# Altium PCB Main_PCB.PcbDoc (part 2 of 2)
Units mil, origin at the board's own origin, x right, y up, seen from the top; angles counter-clockwise.
Board outline 5905.51 x 3937.01 mil, 2 copper layers (Top Layer, Bottom Layer); 255 components, 189 nets, 763 pads, 261 vias.
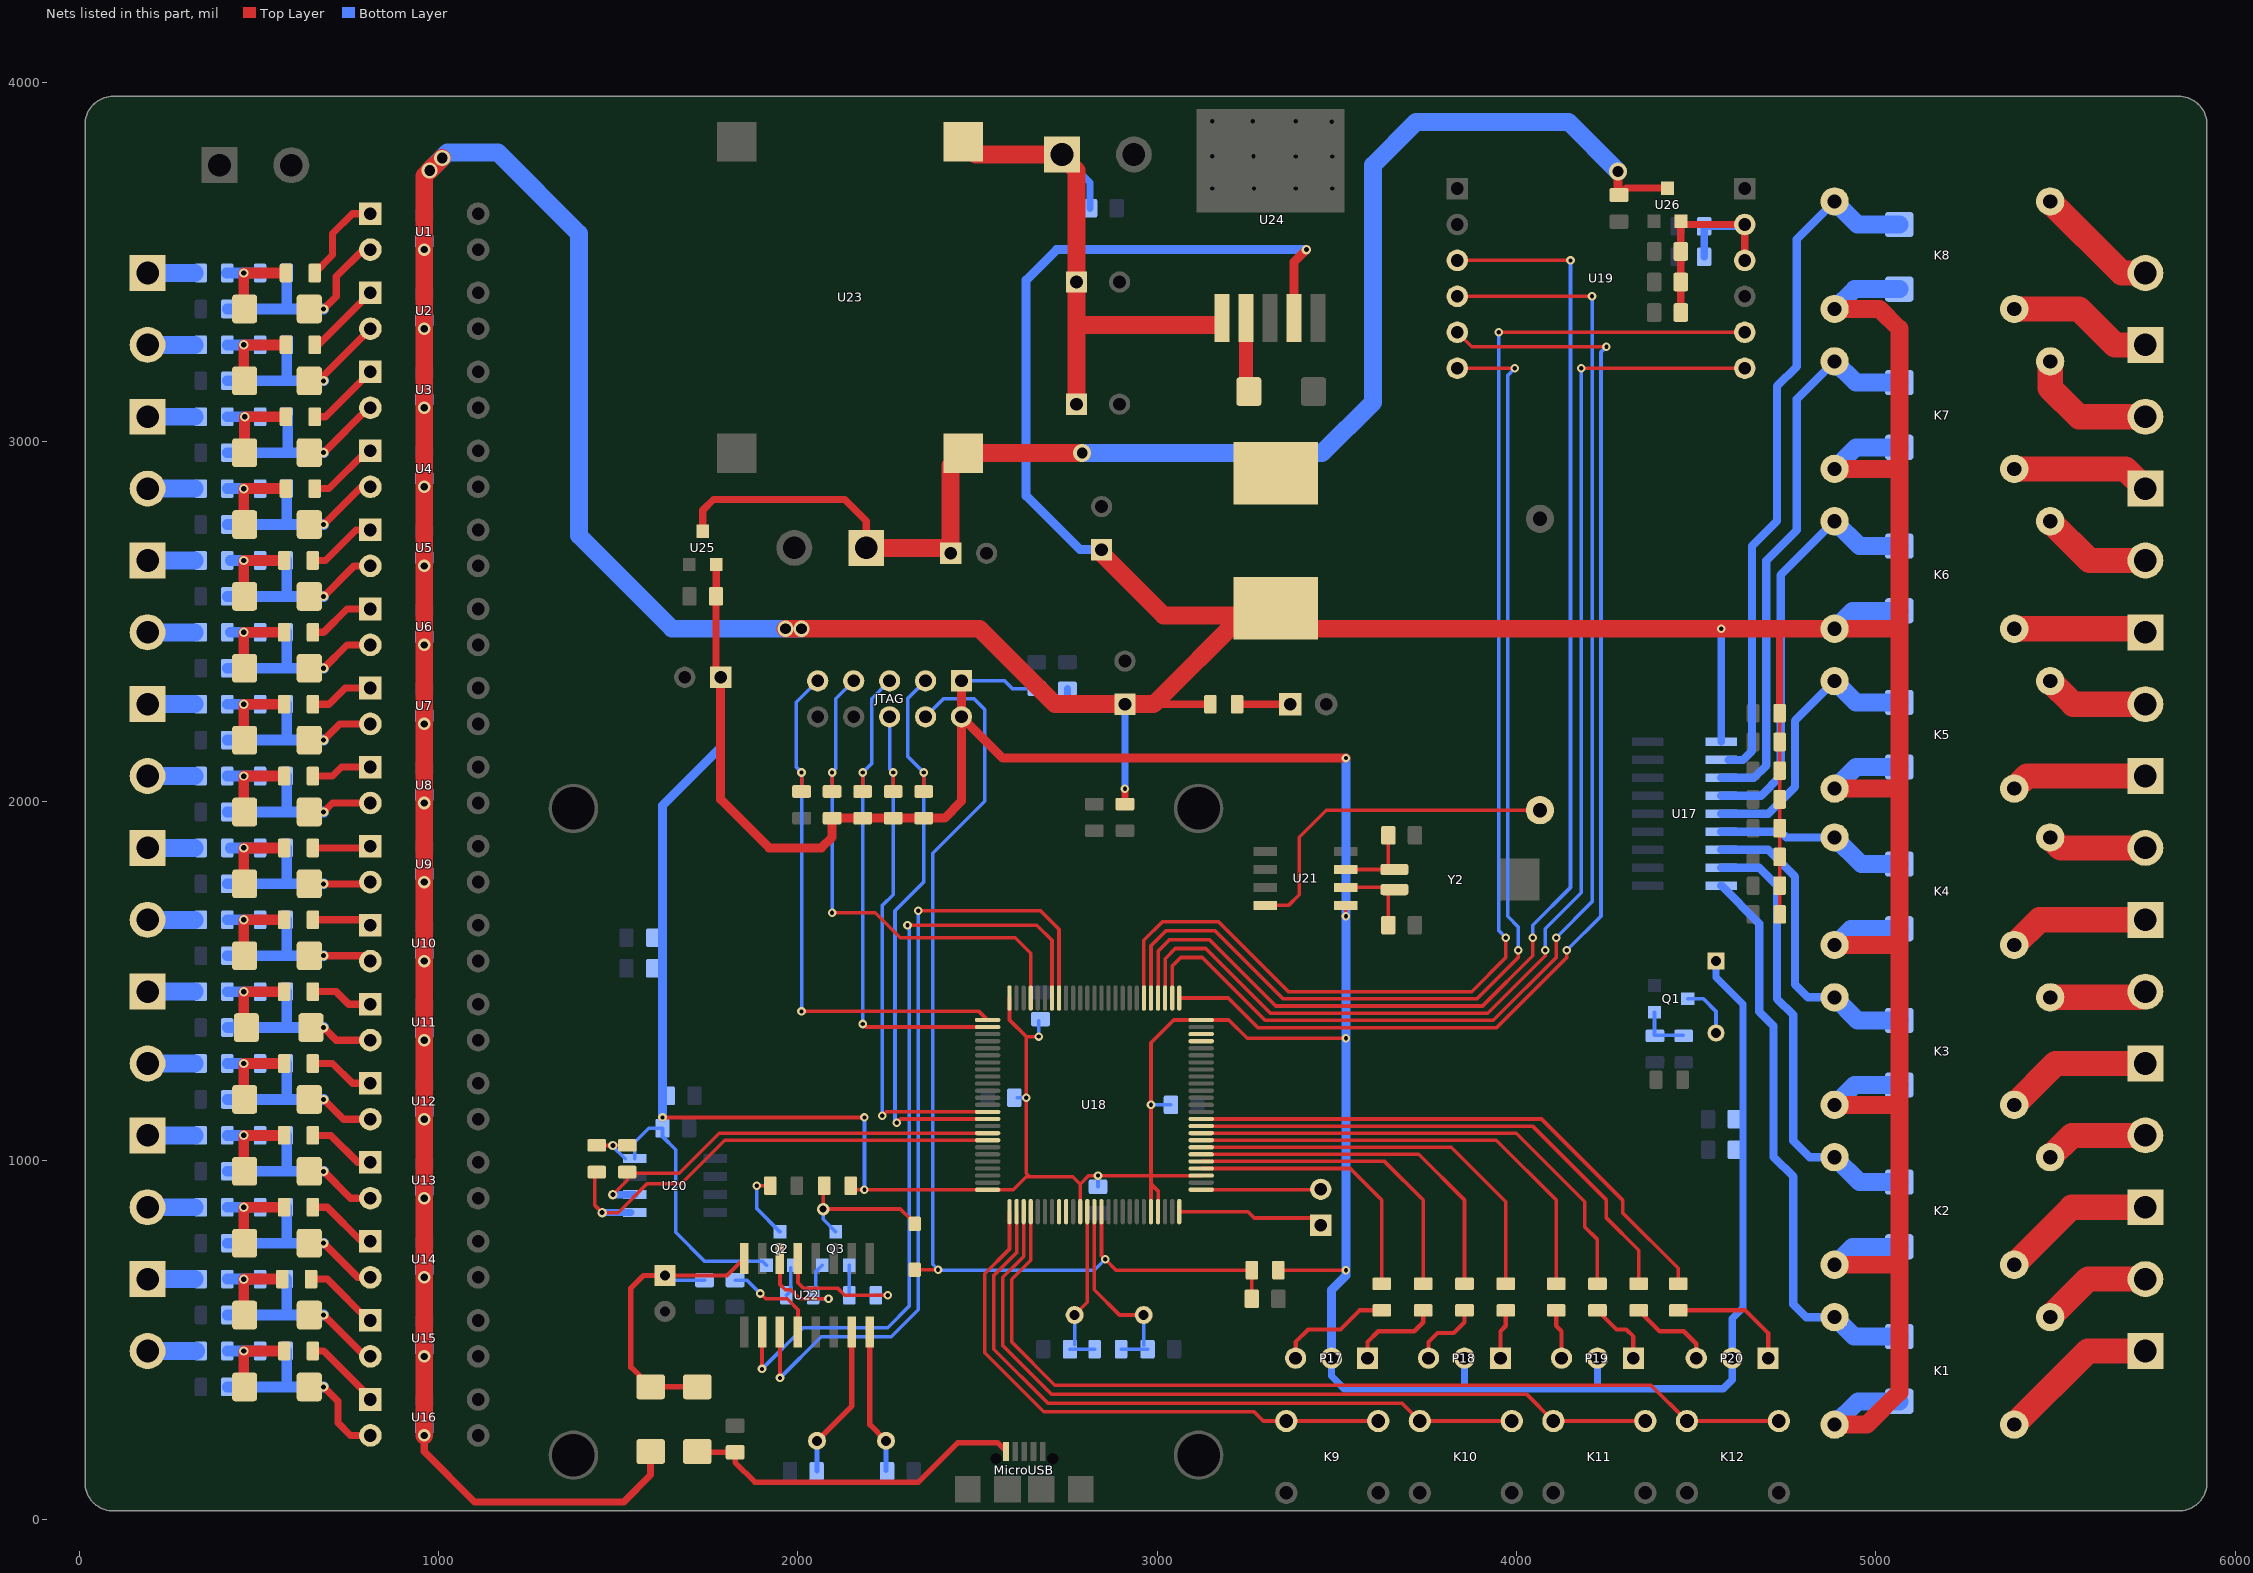
[diagram p2: the nets of this part, all layers, seen from the top]

## Via types
v1: diameter 24, hole 12, Top Layer to Bottom Layer, 202 vias
v2: diameter 26, hole 14, Top Layer to Bottom Layer, 20 vias
v3: diameter 35, hole 20, Top Layer to Bottom Layer, 17 vias
v4: diameter 26, hole 15, Top Layer to Bottom Layer, 16 vias
v5: diameter 45, hole 30, Top Layer to Bottom Layer, 4 vias
v6: diameter 50, hole 30, Top Layer to Bottom Layer, 2 vias

## Nets (pads, with @x,y where several pads share a name; then routed paths per layer and width w, separated by ;. In a path a pad name is that pad's centre, name@x,y a point inside that pad or via, vN(x,y) a via of type N, cw(c..) or ccw(c..) an arc to the next point about the centre after c; other vN are vias at no path point) (continued)
I2C1_SCL: R90.1 U18.92 U20.6 | length 1179
  Top Layer w10: v2(1485,905) 1525,945 R90.1@1525,968 ; R90.1@1535,965 1670,965 1781.26,1076.26 U18.92@2527.76,1076.26
  Bottom Layer w20: v2(1485,905) U20.6@1545.59,905
I2C1_SDA: R91.1 U18.93 U20.5 | length 1360.2
  Top Layer w10: R91.1@1440,968 1435,963 1435,875 v2(1455,855) 1500,855 1580,935 1675,935 1796.57,1056.57 U18.93@2527.76,1056.57
  Bottom Layer w20: v2(1455,855) U20.5@1535.59,855
IN1: P3.1 R1.1 | length 130
  Bottom Layer w50: P3.1@190,3470 320,3470
IN2: P3.2 R3.1 | length 130
  Bottom Layer w50: P3.2@190,3270 320,3270
IN3: P4.1 R5.1 | length 130
  Bottom Layer w50: P4.1@190,3070 320,3070
IN4: P4.2 R7.1 | length 130
  Bottom Layer w50: P4.2@190,2870 320,2870
IN5: P1.1 R9.1 | length 130
  Bottom Layer w50: P1.1@190,2670 320,2670
IN6: P1.2 R11.1 | length 130
  Bottom Layer w50: P1.2@190,2470 320,2470
IN7: P2.1 R13.1 | length 130
  Bottom Layer w50: P2.1@190,2270 320,2270
IN8: P2.2 R15.1 | length 130
  Bottom Layer w50: P2.2@190,2070 320,2070
IN9: P7.1 R33.1 | length 130
  Bottom Layer w50: P7.1@190,1870 320,1870
IN10: P7.2 R35.1 | length 130
  Bottom Layer w50: P7.2@190,1670 320,1670
IN11: P5.1 R37.1 | length 130
  Bottom Layer w50: P5.1@190,1470 320,1470
IN12: P5.2 R39.1 | length 130
  Bottom Layer w50: P5.2@190,1270 320,1270
IN13: P6.1 R41.1 | length 130
  Bottom Layer w50: P6.1@190,1070 320,1070
IN14: P6.2 R43.1 | length 130
  Bottom Layer w50: P6.2@190,870 320,870
IN15: P8.1 R45.1 | length 130
  Bottom Layer w50: P8.1@190,670 320,670
IN16: P8.2 R47.1 | length 135
  Bottom Layer w50: P8.2@190,470 R47.1@325,470
JDQOUT1: D33.1 K1.3 U17.18 | length 1580.2
  Bottom Layer w23: U17.18@4569.72,1765 4675,1659.72 4675,1415 4715,1375 4715,1010 4770,955 4770,600 4805.79,564.21 K1.3@4885,564.21
  Bottom Layer w50: K1.3@4885,564.21 4939.21,510 D33.1@5065,510
JDQOUT2: D34.1 K2.3 U17.17 | length 1247.3
  Bottom Layer w23: U17.17@4569.72,1815 4675,1815 4725,1765 4725,1450 4770,1405 4770,1055 4815.79,1009.21 K2.3@4885,1009.21
  Bottom Layer w50: K2.3@4885,1009.21 4954.21,940 D34.1@5065,940
JDQOUT3: D35.1 K3.3 U17.16 | length 867.8
  Bottom Layer w23: U17.16@4569.72,1865 4700,1865 4775,1790 4775,1490 4810.79,1454.21 K3.3@4885,1454.21
  Bottom Layer w50: K3.3@4885,1454.21 4949.21,1390 D35.1@5065,1390
JDQOUT4: D36.1 K4.3 U17.15 | length 532.6
  Bottom Layer w23: U17.15@4569.72,1915 4735,1915 4750.79,1899.21 K4.3@4885,1899.21
  Bottom Layer w50: K4.3@4885,1899.21 4959.21,1825 D36.1@5065,1825
JDQOUT5: D37.1 K5.3 U17.14 | length 780.6
  Bottom Layer w23: U17.14@4569.72,1965 4700,1965 4775,2040 4775,2224.21 K5.3@4885,2334.21
  Bottom Layer w50: K5.3@4885,2334.21 4944.21,2275 D37.1@5065,2275
JDQOUT6: D38.1 K6.3 U17.13 | length 1168.1
  Bottom Layer w23: U17.13@4569.72,2015 4680,2015 4735,2070 4735,2629.21 K6.3@4885,2779.21
  Bottom Layer w50: K6.3@4885,2779.21 4954.21,2710 D38.1@5065,2710
JDQOUT7: D39.1 K7.3 U17.12 | length 1547.2
  Bottom Layer w23: U17.12@4569.72,2065 4660,2065 4695,2100 4695,2670 4780,2755 4780,3119.21 K7.3@4885,3224.21
  Bottom Layer w50: K7.3@4885,3224.21 4944.21,3165 D39.1@5065,3165
JDQOUT8: D40.1 K8.3 U17.11 | length 1906.4
  Bottom Layer w23: U17.11@4590,2115 4630,2115 4655,2140 4655,2710 4725,2780 4725,3155 4780,3210 4780,3564.21 K8.3@4885,3669.21
  Bottom Layer w50: K8.3@4885,3669.21 4949.21,3605 D40.1@5065,3605
JTCK: JTAG.9 R88.1 U18.76 | length 1531.7
  Top Layer w10: v1(2010,1415) 2503.98,1415 U18.76@2527.76,1391.22 ; R88.1@2010,2027 v1(2010,2080)
  Bottom Layer w10: v1(2010,1415) v1(2010,2080) 1995,2095 1995,2275 JTAG.9@2055,2335
JTDI: JTAG.5 R86.2 U18.77 | length 1390.3
  Top Layer w10: v1(2180,1380) 2188.46,1371.54 U18.77@2527.76,1371.54 ; R86.2@2180,2027 v1(2180,2080)
  Bottom Layer w10: v1(2180,1380) v1(2180,2080) 2205,2105 2205,2285 JTAG.5@2255,2335
JTDO: JTAG.6 R93.2 U18.89 | length 1476.6
  Top Layer w10: v1(2235,1125) 2245.32,1135.31 U18.89@2527.76,1135.31 ; R93.2@2265,2027 v1(2265,2080)
  Bottom Layer w10: v1(2235,1125) 2235,1710 2265,1740 v1(2265,2080) 2255,2090 JTAG.6@2255,2235
JTMS: JTAG.7 R87.2 U18.72 | length 1447.3
  Top Layer w10: v1(2095,1690) 2215,1690 2285,1620 2605,1620 2647.83,1577.17 U18.72@2647.83,1452.24 ; R87.2@2095,2027 v1(2095,2080)
  Bottom Layer w10: v1(2095,1690) v1(2095,2080) 2105,2090 2105,2285 JTAG.7@2155,2335
JTRST: JTAG.3 R85.2 U18.90 | length 1611.2
  Top Layer w10: v1(2275,1105) 2285.63,1115.63 U18.90@2527.76,1115.63 ; R85.2@2350,2027 v1(2350,2080)
  Bottom Layer w10: v1(2275,1105) 2270,1110 2270,1695 2350,1775 v1(2350,2080) ; v1@2347.5,2082.5 2305,2125 2305,2285 JTAG.3@2355,2335
KEY0: K9.2 U18.1 | length 1594.9
  Top Layer w10: U18.1@2588.78,857.76 2588.78,753.78 2520,685 2520,465 2684.09,300.91 3269.09,300.91 3295,275 K9.2@3359.09,275 K9.2@3615,275
KEY1: K10.2 U18.2 | length 1933.6
  Top Layer w10: U18.2@2608.46,857.76 2608.46,743.46 2545,680 2545,475 2695,325 3680.76,325 K10.2@3730.76,275 K10.2@3986.67,275
KEY2: K11.2 U18.3 | length 2272.2
  Top Layer w10: U18.3@2628.15,857.76 2628.15,733.15 2570,675 2570,485 2705,350 4027.43,350 K11.2@4102.43,275 K11.2@4358.33,275
KEY3: K12.2 U18.4 | length 2610.8
  Top Layer w10: U18.4@2647.83,857.76 2647.83,722.83 2595,670 2595,495 2715,375 4374.09,375 K12.2@4474.09,275 K12.2@4730,275
LED0_0: R75.2 U18.29 | length 772.1
  Top Layer w10: U18.29@3122.24,977.83 3537.17,977.83 3625,890 R75.2@3625,657
LED0_1: R76.2 U18.30 | length 895.3
  Top Layer w10: U18.30@3122.24,997.52 3632.48,997.52 3740,890 R76.2@3740,657
LED1_0: R77.2 U18.31 | length 1018.4
  Top Layer w10: U18.31@3122.24,1017.2 3727.8,1017.2 3855,890 R77.2@3855,657
LED1_1: R78.2 U18.32 | length 1138.7
  Top Layer w10: U18.32@3122.24,1036.89 3818.11,1036.89 3970,885 R78.2@3970,657
LED2_0: R79.2 U18.33 | length 1289.8
  Top Layer w10: U18.33@3122.24,1056.57 3943.43,1056.57 4110,890 R79.2@4110,657
LED2_1: R80.2 U18.34 | length 1389.5
  Top Layer w10: U18.34@3122.24,1076.26 3998.74,1076.26 4190,885 4190,815 4225,780 R80.2@4225,657
LED3_0: R81.2 U18.35 | length 1483.3
  Top Layer w10: U18.35@3122.24,1095.94 4044.06,1095.94 4250,890 4250,840 4340,750 R81.2@4340,657
LED3_1: R82.2 U18.36 | length 1563.4
  Top Layer w10: U18.36@3122.24,1115.63 4069.37,1115.63 4295,890 4295,855 4450,700 R82.2@4450,657
LI_BAT: C27.1 C31.1 P23.1 U23.4 U25.3 U26.3 | length 3978
  Top Layer w20: U25.3@1735,2751.26 1735,2810 1765,2840 2130,2840 2190,2780 P23.1@2190,2705 ; C31.1@4285,3687 4304.26,3706.26 U26.3@4420,3706.26
  Top Layer w25: C31.1@4282.5,3689.5 v6(4282.5,3752.5)
  Top Layer w50: P23.1@2190,2705 C27.1@2410,2705 ; C27.1@2425,2705 2425,2933.86 U23.4@2460,2968.86 v6(2791.14,2968.86)
  Bottom Layer w50: v6(2791.14,2968.86) 3458.86,2968.86 3600,3110 3600,3770 3720,3890 4145,3890 v6(4282.5,3752.5)
NetBAT1_1: BAT1.1 U21.8 | length 967.9
  Top Layer w10: U21.8@3300.59,1710 3365,1710 3395,1740 3395,1900 3470,1975 BAT1.1@4065,1975
NetBEEP1_2: BEEP.2 Q1.3 | length 153.2
  Bottom Layer w10: Q1.3@4476.26,1450 4520,1450 4555,1415 BEEP.2@4555,1355
NetC4_2: C4.2 U21.2 Y2.2 | length 224
  Top Layer w10: U21.2@3525,1760 Y2.2@3654,1760 ; C4.2@3643,1655 Y2.2@3643,1750
NetC5_2: C5.2 U21.3 Y2.1 | length 213
  Top Layer w10: U21.3@3525,1810 3643,1810 C5.2@3643,1905
NetC8_1: C8.1 C9.2 D42.2 D43.2 U22.16 | length 892.3
  Top Layer w12: C8.1@1630,680 1802.64,680 U22.16@1850,727.36
  Top Layer w15: C8.1@1630,680 1570,680 1535,645 1535,425 D42.2@1590,370 D43.2@1720,370
  Bottom Layer w10: C8.1@1630,680 1643,667 C9.2@1740,667
NetC10_2: C10.2 U22.8 Y3.1 | length 403.3
  Top Layer w15: U22.8@2200,522.64 2200,265 Y3.1@2245,220
  Bottom Layer w15: C10.2@2245,138 Y3.1@2245,220
NetC11_2: C11.2 U22.7 Y3.2 | length 427
  Top Layer w15: Y3.2@2052.87,220 2150,317.13 U22.7@2150,522.64
  Bottom Layer w15: C11.2@2052.87,135.87 Y3.2@2052.87,220
NetC12_1: C12.1 U22.4 | length 271.3
  Top Layer w10: v1(1895,630) 1910,615 1970,615 2000,585 U22.4@2000,522.64
  Bottom Layer w10: C12.1@1825,667 1858,667 v1(1895,630)
NetC22_1: C22.1 C24.2 C26.1 P22.1 U23.1 U24.1 | length 1583.4
  Top Layer w20: P22.1@2735,3800 2755,3780 P22.1@2755,3775
  Top Layer w50: U23.1@2460,3835 2495,3800 P22.1@2735,3800 ; P22.1@2755,3775 2775,3755 C22.1@2775,3445 2775,3325 ; C26.1@2775,3105 2775,3325 ; U24.1@3175,3325 2775,3325
  Bottom Layer w20: P22.1@2735,3800 2813,3722 C24.2@2813,3650
NetD1_1: D1.1 R2.1 R17.1 U1.2 | length 572.6
  Top Layer w20: v2(680,3370) 715,3405 715,3460 U1.2@790,3535
  Bottom Layer w30: R2.1@412,3370 574,3370 ; 577,3370 v2(680,3370) ; 577,3373 R17.1@577,3470
NetD1_2: D1.2 D9.1 R1.2 R17.2 | length 308
  Top Layer w30: D1.2@457.5,3372.5 v4(457.5,3470) D9.1@575,3470
  Bottom Layer w30: R1.2@410,3470 R1.2@412,3470 v4(457.5,3470) R17.2@503,3470
NetD2_1: D2.1 R4.1 R18.1 U2.2 | length 564.8
  Top Layer w20: v2(680,3170) 680,3185 U2.2@810,3315
  Bottom Layer w30: R4.1@412,3170 v2(680,3170) ; 577,3172 R18.1@577,3270
NetD2_2: D2.2 D10.1 R3.2 R18.2 | length 306
  Top Layer w30: D2.2@457.5,3172.5 v4(457.5,3270) D10.1@575,3270
  Bottom Layer w30: R3.2@412,3270 R18.2@503,3270
NetD3_1: D3.1 R6.1 R19.1 U3.2 | length 541.8
  Top Layer w20: v2(680,2970) U3.2@805,3095
  Bottom Layer w30: R6.1@412,2970 580,2970 ; R19.1@580,3067 580,2970 ; v2(680,2970) 580,2970
NetD3_2: D3.2 D11.1 R5.2 R19.2 | length 306
  Top Layer w30: D3.2@460,2970 v4(460,3070) D11.1@575,3070
  Bottom Layer w30: R5.2@412,3070 R19.2@503,3070
NetD4_1: D4.1 R8.1 R20.1 U4.2 | length 513.5
  Top Layer w20: v2(680,2770) U4.2@785,2875
  Bottom Layer w30: R8.1@412,2770 v2(680,2770) ; 577,2773 R20.1@577,2870
NetD4_2: D4.2 D12.1 R7.2 R20.2 | length 306
  Top Layer w30: D4.2@457.5,2772.5 v4(457.5,2870) D12.1@575,2870
  Bottom Layer w30: R7.2@412,2870 R20.2@503,2870
NetD5_1: D5.1 R10.1 R21.1 U5.2 | length 527.2
  Top Layer w20: v2(680,2570) 765,2655 U5.2@810,2655
  Bottom Layer w30: R10.1@412,2570 574,2570 ; 577,2570 v2(680,2570) ; 577,2573 R21.1@577,2670
NetD5_2: D5.2 D13.1 R9.2 R21.2 | length 293
  Top Layer w30: D5.2@457.5,2572.5 v4(457.5,2670) D13.1@570,2670
  Bottom Layer w30: R9.2@420,2670 R21.2@503,2670
NetD6_1: D6.1 R12.1 R22.1 U6.2 | length 518.9
  Top Layer w20: v2(680,2370) 745,2435 U6.2@810,2435
  Bottom Layer w30: R12.1@412,2370 574,2370 ; 577,2370 v2(680,2370) ; 577,2373 R22.1@577,2470
NetD6_2: D6.2 D14.1 R11.2 R22.2 | length 293
  Top Layer w30: D6.2@457.5,2372.5 v4(457.5,2470) D14.1@570,2470
  Bottom Layer w30: R11.2@420,2470 R22.2@503,2470
NetD7_1: D7.1 R14.1 R23.1 U7.2 | length 510.6
  Top Layer w20: v2(680,2170) 725,2215 U7.2@810,2215
  Bottom Layer w30: R14.1@412,2170 574,2170 ; 577,2170 v2(680,2170) ; 577,2173 R23.1@577,2270
NetD7_2: D7.2 D15.1 R13.2 R23.2 | length 301
  Top Layer w30: D7.2@457.5,2172.5 v4(457.5,2270) D15.1@570,2270
  Bottom Layer w30: R13.2@412,2270 R23.2@503,2270
NetD8_1: D8.1 R16.1 R24.1 U8.2 | length 502.4
  Top Layer w20: v2(680,1970) 705,1995 U8.2@810,1995
  Bottom Layer w30: R16.1@412,1970 574,1970 ; 577,1970 v2(680,1970) ; 577,1973 R24.1@577,2070
NetD8_2: D8.2 D16.1 R15.2 R24.2 | length 301
  Top Layer w30: D8.2@457.5,1972.5 v4(457.5,2070) D16.1@570,2070
  Bottom Layer w30: R15.2@412,2070 R24.2@503,2070
NetD9_2: D9.2 U1.1 | length 258.5
  Top Layer w20: D9.2@655,3470 705,3520 705,3580 760,3635 U1.1@810,3635
NetD10_2: D10.2 U2.1 | length 215.1
  Top Layer w20: D10.2@655,3270 665,3270 U2.1@810,3415
NetD11_2: D11.2 U3.1 | length 206.8
  Top Layer w20: D11.2@655,3070 685,3070 U3.1@810,3195
NetD12_2: D12.2 U4.1 | length 188.5
  Top Layer w20: D12.2@655,2870 695,2870 U4.1@800,2975
NetD13_2: D13.2 U5.1 | length 195.2
  Top Layer w20: D13.2@650,2670 685,2670 770,2755 U5.1@810,2755
NetD14_2: D14.2 U6.1 | length 186.9
  Top Layer w20: D14.2@650,2470 680,2470 745,2535 U6.1@810,2535
NetD15_2: D15.2 U7.1 | length 178.6
  Top Layer w20: D15.2@650,2270 695,2270 740,2315 U7.1@810,2315
NetD16_2: D16.2 U8.1 | length 170.4
  Top Layer w20: D16.2@650,2070 705,2070 730,2095 U8.1@810,2095
NetD17_1: D17.1 R34.1 R49.1 U9.2 | length 489
  Top Layer w20: v2(680,1770) U9.2@805,1770
  Bottom Layer w30: R34.1@412,1770 575,1770 ; 577,1770 v2(680,1770) ; 577,1772 R49.1@577,1870
NetD17_2: D17.2 D25.1 R33.2 R49.2 | length 293
  Top Layer w30: D17.2@457.5,1772.5 v4(457.5,1870) D25.1@570,1870
  Bottom Layer w30: R33.2@420,1870 R49.2@503,1870
NetD18_1: D18.1 R36.1 R50.1 U10.2 | length 480
  Top Layer w20: v2(680,1570) U10.2@795,1570
  Bottom Layer w30: R36.1@412,1570 v2(680,1570) ; 577,1573 R50.1@577,1670
NetD18_2: D18.2 D26.1 R35.2 R50.2 | length 301
  Top Layer w30: D18.2@457.5,1572.5 v4(457.5,1670) D26.1@570,1670
  Bottom Layer w30: R35.2@412,1670 R50.2@503,1670
NetD19_1: D19.1 R38.1 R51.1 U11.2 | length 506.5
  Top Layer w20: v2(680,1370) 715,1335 U11.2@810,1335
  Bottom Layer w30: R38.1@412,1370 574,1370 ; 577,1370 v2(680,1370) ; 577,1373 R51.1@577,1470
NetD19_2: D19.2 D27.1 R37.2 R51.2 | length 301
  Top Layer w30: D19.2@457.5,1372.5 v4(457.5,1470) D27.1@570,1470
  Bottom Layer w30: R37.2@412,1470 R51.2@503,1470
NetD20_1: D20.1 R40.1 R52.1 U12.2 | length 516.8
  Top Layer w20: v2(680,1170) 735,1115 U12.2@810,1115
  Bottom Layer w30: R40.1@412,1170 575,1170 ; 577,1170 v2(680,1170) ; 577,1172 R52.1@577,1270
NetD20_2: D20.2 D28.1 R39.2 R52.2 | length 301
  Top Layer w30: D20.2@457.5,1172.5 v4(457.5,1270) D28.1@570,1270
  Bottom Layer w30: R39.2@412,1270 R52.2@503,1270
NetD21_1: D21.1 R42.1 R53.1 U13.2 | length 522.1
  Top Layer w20: v2(680,970) 755,895 U13.2@810,895
  Bottom Layer w30: R42.1@412,970 v2(680,970) ; 577,977 R53.1@577,1070
NetD21_2: D21.2 D29.1 R41.2 R53.2 | length 301
  Top Layer w30: D21.2@457.5,972.5 v4(457.5,1070) D29.1@570,1070
  Bottom Layer w30: R41.2@412,1070 R53.2@503,1070
NetD22_1: D22.1 R44.1 R54.1 U14.2 | length 531.4
  Top Layer w20: v2(680,770) 775,675 U14.2@810,675
  Bottom Layer w30: R44.1@412,770 574,770 ; 577,770 v2(680,770) ; 577,773 R54.1@577,870
NetD22_2: D22.2 D30.1 R43.2 R54.2 | length 301
  Top Layer w30: D22.2@457.5,772.5 v4(457.5,870) D30.1@570,870
  Bottom Layer w30: R43.2@412,870 R54.2@503,870
NetD23_1: D23.1 R46.1 R55.1 U15.2 | length 524.6
  Top Layer w20: v2(680,570) U15.2@795,455
  Bottom Layer w30: R46.1@412,570 574,570 ; 577,570 v2(680,570) ; 577,573 R55.1@577,670
NetD23_2: D23.2 D31.1 R45.2 R55.2 | length 296
  Top Layer w30: D23.2@457.5,572.5 v4(457.5,670) D31.1@565,670
  Bottom Layer w30: R45.2@412,670 R55.2@503,670
NetD24_1: D24.1 R48.1 R56.1 U16.2 | length 585.1
  Top Layer w20: v2(680,370) 720,330 720,270 755,235 U16.2@810,235
  Bottom Layer w30: R48.1@412,370 575,370 ; 577,370 v2(680,370) ; 577,372 R56.1@577,470
NetD24_2: D24.2 D32.1 R47.2 R56.2 | length 301
  Top Layer w30: D24.2@457.5,372.5 v4(457.5,470) D32.1@570,470
  Bottom Layer w30: R47.2@412,470 R56.2@503,470
NetD25_2: D25.2 U9.1 | length 155
  Top Layer w20: D25.2@650,1870 U9.1@805,1870
NetD26_2: D26.2 U10.1 | length 145
  Top Layer w20: D26.2@650,1670 U10.1@795,1670
NetD27_2: D27.2 U11.1 | length 174.5
  Top Layer w20: D27.2@650,1470 715,1470 750,1435 U11.1@810,1435
NetD28_2: D28.2 U12.1 | length 182.8
  Top Layer w20: D28.2@650,1270 705,1270 760,1215 U12.1@810,1215
NetD29_2: D29.2 U13.1 | length 191.1
  Top Layer w20: D29.2@650,1070 700,1070 775,995 U13.1@810,995
NetD30_2: D30.2 U14.1 | length 174.4
  Top Layer w20: D30.2@650,870 690,870 U14.1@785,775
NetD31_2: D31.2 U15.1 | length 207.6
  Top Layer w20: D31.2@645,670 690,670 U15.1@805,555
NetD32_2: D32.2 U16.1 | length 213.8
  Top Layer w20: D32.2@650,470 680,470 U16.1@810,340
NetD41_2: D41.2 Q3.3 R97.1 | length 397.7
  Top Layer w10: R97.1@2070,927 v3(2070,865) 2285,865 D41.2@2315,835
  Bottom Layer w10: v3(2070,865) 2070,836.26 Q3.3@2105,801.26
NetD44_2: D44.2 L1.1 U24.2 | length 201.9
  Top Layer w39.37: D44.2@3246.93,3143.07 U24.2@3246.93,3345
NetD45_1: D45.1 R99.1 | length 148
  Top Layer w20: R99.1@3222,2270 D45.1@3370,2270
NetK1_1: K1.1 P9.1 | length 449.9
  Top Layer w70: K1.1@5385,265 5590,470 P9.1@5750,470
NetK1_2: K1.2 P9.2 | length 308.8
  Top Layer w70: K1.2@5485,564.21 5590.79,670 P9.2@5750,670
NetK2_1: K2.1 P10.1 | length 431.3
  Top Layer w70: K2.1@5385,710 5545,870 P10.1@5750,870
NetK2_2: K2.2 P10.2 | length 290.2
  Top Layer w70: K2.2@5485,1009.21 5545.79,1070 P10.2@5750,1070
NetK3_1: K3.1 P11.1 | length 412.6
  Top Layer w70: K3.1@5385,1155 5500,1270 P11.1@5750,1270
NetK3_2: K3.2 P11.2 | length 249.2
  Top Layer w70: K3.2@5485,1454.21 P11.2@5734.21,1454.21
NetK4_1: K4.1 P12.1 | length 394
  Top Layer w70: K4.1@5385,1600 5455,1670 P12.1@5750,1670
NetK4_2: K4.2 P12.2 | length 277.1
  Top Layer w70: K4.2@5485,1899.21 5514.21,1870 P12.2@5750,1870
NetK5_1: K5.1 P13.1 | length 379.5
  Top Layer w70: K5.1@5385,2035 5420,2070 P13.1@5750,2070
NetK5_2: K5.2 P13.2 | length 291.6
  Top Layer w70: K5.2@5485,2334.21 5549.21,2270 P13.2@5750,2270
NetK6_1: K6.1 P14.1 | length 355
  Top Layer w70: K6.1@5385,2480 P14.1@5740,2480
NetK6_2: K6.2 P14.2 | length 310.2
  Top Layer w70: K6.2@5485,2779.21 5594.21,2670 P14.2@5750,2670
NetK7_1: K7.1 P15.1 | length 387.8
  Top Layer w70: K7.1@5385,2925 5695,2925 P15.1@5750,2870
NetK7_2: K7.2 P15.2 | length 372.4
  Top Layer w70: K7.2@5485,3224.21 5485,3150 5565,3070 P15.2@5750,3070
NetK8_1: K8.1 P16.1 | length 406.4
  Top Layer w70: K8.1@5385,3370 5565,3370 5665,3270 P16.1@5750,3270
NetK8_2: K8.2 P16.2 | length 347.5
  Top Layer w70: K8.2@5485,3669.21 5684.21,3470 P16.2@5750,3470
NetP17_1: P17.1 R76.1 | length 255.8
  Top Layer w12: P17.1@3585,450 3585,495 3615,525 3715,525 3740,550 R76.1@3740,583
NetP17_3: P17.3 R75.1 | length 321.5
  Top Layer w12: P17.3@3385,450 3385,495 3420,530 3510,530 3563,583 R75.1@3625,583
NetP18_1: P18.1 R78.1 | length 139.2
  Top Layer w12: P18.1@3955,450 3955,525 3970,540 R78.1@3970,583
NetP18_3: P18.3 R77.1 | length 190.8
  Top Layer w12: P18.3@3755,460 3755,495 3780,520 3825,520 3855,550 R77.1@3855,583
NetP19_1: P19.1 R80.1 | length 190.2
  Top Layer w12: R80.1@4225,583 4278,530 4305,530 4325,510 P19.1@4325,450
NetP19_3: P19.3 R79.1 | length 139.2
  Top Layer w12: R79.1@4110,583 4110,540 4125,525 P19.3@4125,450
NetP20_1: P20.1 R82.1 | length 346.1
  Top Layer w12: R82.1@4450,583 4637,583 4700,520 P20.1@4700,450
NetP20_3: P20.3 R81.1 | length 238.5
  Top Layer w12: R81.1@4340,583 4398,525 4465,525 4500,490 P20.3@4500,450
NetQ1_2: Q1.2 R89.2 R92.2 | length 144.3
  Bottom Layer w10: Q1.2@4383.74,1412.6 4383.74,1348.26 R92.2@4463.74,1348.26
NetQ2_2: Q2.2 R96.1 | length 81.3
  Bottom Layer w10: R96.1@1968,625 1980,637 Q2.2@1980,701.34
NetQ2_3: Q2.3 R94.2 | length 193.7
  Top Layer w10: v1(1885,930) R94.2@1923,930
  Bottom Layer w10: v1(1885,930) 1885,866.26 Q2.3@1950,801.26
NetQ3_1: Q3.1 R96.2 U22.14 | length 350
  Top Layer w10: U22.14@1950,727.36 1950,655 1965,640 1980,640 2005,615 v1(2085,615)
  Bottom Layer w10: R96.2@2042,615 v1(2085,615) ; R96.2@2050,633 2050,691.14 Q3.1@2067.6,708.74
NetQ3_2: Q3.2 R98.1 | length 83.1
  Bottom Layer w10: R98.1@2142.4,625.6 Q3.2@2142.4,708.74
NetR98_2: R98.2 U22.13 | length 364.9
  Top Layer w10: U22.13@2000,727.36 2000,660 2015,645 2110,645 2130,625 v1(2250,625)
  Bottom Layer w10: R98.2@2217,625 v1(2250,625)
OSC32_IN: U18.8
OSC32_OUT: U18.9
OSC_IN: C2.1 R74.1 U18.12 Y1.1 | length 452.9
  Top Layer w10: Y1.1@2770,570 2805.32,605.31 U18.12@2805.32,857.76
  Bottom Layer w10: C2.1@2757,475 R74.1@2825.5,475 ; C2.1@2770,488 Y1.1@2770,570
OSC_OUT: C3.1 R74.2 U18.13 Y1.2 | length 541.5
  Top Layer w10: U18.13@2825,857.76 2825,640 2895,570 Y1.2@2962.13,570
  Bottom Layer w10: R74.2@2899.5,475 C3.1@2973,475 ; C3.1@2962.13,485.87 Y1.2@2962.13,570
RESET: C1.1 D41.1 JTAG.4 R73.1 U18.14 | length 3003.3
  Top Layer w10: D41.1@2325,696 v1(2390,696) ; U18.14@2844.68,857.76 2844.68,735.31 v1(2855,725) 2885,695 R73.1@3263,695 C1.1@3263,615
  Bottom Layer w10: JTAG.4@2355,2235 2405,2285 2490,2285 2520,2255 2520,2000 2375,1855 2375,711 v1(2390,696) ; v1@2390,695 2825,695 v1(2855,725)
SPI2_MISO: U18.53 U19.7 | length 3451.7
  Top Layer w10: U18.53@3021.85,1452.24 3021.85,1561.85 3050,1590 3135,1590 3315,1410 3920,1410 4080,1570 v1(4080,1585) ; v1(4180,3205) U19.7@4635,3205
  Bottom Layer w10: v1(4080,1585) 4080,1645 4180,1745 v1(4180,3205)
SPI2_MOSI: U18.54 U19.3 | length 3614.5
  Top Layer w10: U18.54@3002.17,1452.24 3002.17,1582.17 3035,1615 3145,1615 3330,1430 3905,1430 4045,1570 v1(4045,1620) ; U19.3@3835,3505 v1(4150,3505)
  Bottom Layer w10: v1(4045,1620) 4045,1655 4150,1760 v1(4150,3505)
SPI2_SCK: U18.52 U19.4 | length 3568.9
  Top Layer w10: U18.52@3041.54,1452.24 3041.54,1541.54 3065,1565 3125,1565 3300,1390 3935,1390 4110,1565 v1(4110,1620) ; U19.4@3835,3405 v1(4210,3405)
  Bottom Layer w10: v1(4110,1620) 4210,1720 v1(4210,3405)
USART1_RX: U18.69 U22.2 | length 2227.3
  Top Layer w10: v1(1900,420) U22.2@1900,522.64 ; v1(2305,1655) 2665,1655 2706.89,1613.11 U18.69@2706.89,1452.24
  Bottom Layer w10: v1(1900,420) 2015,535 2250,535 2310,595 2310,1650 v1(2305,1655)
USART1_TX: U18.68 U22.3 | length 2305.5
  Top Layer w10: v1(1950,395) U22.3@1950,522.64 ; v1(2335,1695) 2675,1695 2726.57,1643.43 U18.68@2726.57,1452.24
  Bottom Layer w10: v1(1950,395) 2065,510 2260,510 2335,585 v1(2335,1695)
USART2_RX: P21.2 U18.26 | length 332.8
  Top Layer w10: U18.26@3122.24,918.78 P21.2@3455,918.78
USART2_TX: P21.1 U18.25 | length 409.4
  Top Layer w10: U18.25@3061.22,857.76 3252.24,857.76 3270,840 3435,840 P21.1@3455,820
USART3_RX: U18.48
USART3_TX: U18.47
VCC+3.3: BEEP.1 C6.1 C7.1 C14.2 C16.2 C18.2 C20.2 C23.2 C25.2 C28.2 C29.2 C30.2 C32.1 C37.1 JTAG.1 JTAG.2 P17.2 P18.2 P19.2 P20.2 Q2.1 R73.2 R85.1 R86.1 R87.1 R90.2 R91.2 R93.1 R97.2 U18.11 U18.21 U18.22 U18.28 U18.50 U18.75 U18.100 U20.8 U21.1 U25.1 | length 13453.6
  Top Layer w10: v2(1485,1042) R90.2@1525,1042 ; R97.2@2158.22,918.78 U18.100@2527.76,918.78 2598.78,918.78 2635,955 2645,955 ; U18.75@2588.78,1452.24 2588.78,1391.22 2635,1345 ; v1(2670,1345) 2635,1345 ; U18.11@2785.63,857.76 2785.63,934.37 ; U18.21@2982.48,857.76 2982.48,935 ; U18.22@3002.17,857.76 3002.17,915.31 2982.48,935 ; U18.28@3122.24,958.15 2982.48,958.15 ; R73.2@3337,695 v1(3525,695) ; v1(3525,1340) 3250,1340 3198.78,1391.22 U18.50@3122.24,1391.22 3046.22,1391.22 2982.48,1327.48 v1(2982.48,1155) 2982.48,958.15 ; v1(3525,1680) U21.1@3525,1710 ; 2635,1345 v1(2635,1175) 2635,965 2645,955 ; 2645,955 2765,955 2785.63,934.37 ; 2785.63,934.37 2809.41,958.15 v1(2835,958.15) 2982.48,958.15 ; 2982.48,935 2982.48,958.15
  Top Layer w12: R91.2@1440,1042 v2(1485,1042) ; v1(1623,1120) v1(2185,1120)
  Top Layer w20: C37.1@1772,2358 C32.1@1772,2570 ; C32.1@1772.4,2570.4 U25.1@1772.4,2658.74
  Top Layer w25: C37.1@1785,2345 1785,2005 1920,1870 2065,1870 2095,1900 R87.1@2095,1953 R86.1@2180,1953 R93.1@2265,1953 R85.1@2350,1953 2408,1953 2455,2000 JTAG.2@2455,2235 ; JTAG.1@2455,2335 JTAG.2@2455,2235 ; v1(3525,2120) 2570,2120 JTAG.2@2455,2235
  Bottom Layer w10: v2@1482.5,1042 U20.8@1519.5,1005 ; U20.8@1545.59,1005 1545.59,1050.59 1585,1090 C6.1@1623,1090 1623,1067 1660,1030 1660,800 1740,720 1901.34,720 Q2.1@1912.6,708.74 ; JTAG.1@2455,2335 2575,2335 2597,2313 C7.1@2665,2313 ; C16.2@2610,1175 v1(2635,1175) ; v1(2670,1345) C18.2@2670,1388.59 ; C20.2@2835,927 v1(2835,958.15) ; v1(2982.48,1155) C14.2@3038,1155
  Bottom Layer w12: v1(2185,918.78) v1(2185,1120)
  Bottom Layer w20: P17.2@3485,450 3485,400 3520,365 4575,365 4600,390 P20.2@4600,450 4600,560 4630,590 4630,1435 4555,1510 BEEP.1@4555,1555 ; 3855,370 P18.2@3855,450 ; 4225,370 P19.2@4225,450
  Bottom Layer w25: v1(1623,1120) 1623,1988 1785,2150 C37.1@1785,2345 ; P17.2@3485,440 3485,640 3525,680 v1(3525,1340) v1(3525,1680) v1(3525,2120)
VCC+3.3W: C15.2 C17.2 C19.2 C21.2 C33.1 U19.10 U19.11 U26.1 | length 727.6
  Top Layer w20: C17.2@4457,3360 C15.2@4457,3445 U26.1@4457,3613.34 ; U26.1@4457.4,3613.74 4466.14,3605 U19.11@4635,3605 U19.10@4635,3505
  Bottom Layer w20: C21.2@4522,3515 C19.2@4522,3600 U19.11@4630,3600
VCC+5: C34.2 C35.1 C36.1 D33.2 D34.2 D35.2 D36.2 D37.2 D38.2 D39.2 D40.2 D42.1 K1.4 K2.4 K3.4 K4.4 K5.4 K6.4 K7.4 K8.4 L1.2 R25.2 R26.2 R27.2 R28.2 R29.2 R30.2 R31.2 R32.2 R57.2 R58.2 R59.2 R60.2 R61.2 R62.2 R63.2 R64.2 R65.2 R66.2 R67.2 R68.2 R69.2 R70.2 R71.2 R72.2 R83.2 R99.2 U17.10 U24.4 | length 19650.5
  Top Layer w10: R72.2@4732,1685 R71.2@4732,1765 R70.2@4732,1845 R69.2@4732,1925 R68.2@4732,2005 R67.2@4732,2085 R66.2@4732,2165 R65.2@4732,2245
  Top Layer w20: v3(960,235) 960,190 1100,50 1515,50 1590,125 D42.1@1590,190 ; R83.2@2910,1992 v1(2910,2035) ; 2990,2270 R99.2@3148,2270 ; R65.2@4732,2245 4732,2477
  Top Layer w25: U24.4@3380.79,3345 3380.79,3500.79 v2(3415,3535)
  Top Layer w50: v3(960,235) v3(960,455) v3(960,675) v3(960,895) v3(960,1115) v3(960,1335) v3(960,1555) v3(960,1775) v3(960,1995) v3(960,2215) v3(960,2435) v3(960,2655) v3(960,2875) v3(960,3095) v3(960,3315) v3(960,3535) 960,3740 v5(975,3755) v5(1010,3790) ; v5(1965,2480) 2505,2480 2715,2270 C35.1@2910,2270 2990,2270 3237.13,2517.13 3017.87,2517.13 2845,2690 C36.1@2845,2700 ; L1.2@3362.13,2480 v1(4569.72,2480) K6.4@4885,2480 5065,2480 ; K1.4@4885,265 4975,265 5065,355 5065,710 ; K2.4@4885,710 5065,710 ; K3.4@4885,1155 5060,1155 ; K4.4@4885,1600 5060,1600 ; K5.4@4885,2035 5065,2035 ; K7.4@4885,2925 5055,2925 ; K8.4@4885,3370 5010,3370 5065,3315 5065,2480 ; 5065,710 5065,2035 ; 5065,2035 5065,2480
  Bottom Layer w20: C34.2@2750,2313 2750,2285 2765,2270 C35.1@2910,2270 v1(2910,2035) ; U17.10@4569.72,2165 v1(4569.72,2480)
  Bottom Layer w25: C36.1@2845,2700 2785,2700 2635,2850 2635,3450 2720,3535 v2(3415,3535)
  Bottom Layer w50: v5(975,3755) 1025,3805 1165,3805 1390,3580 1390,2740 1650,2480 v5(2010,2480) ; K1.4@4885,265 4950,330 D33.2@5065,330 ; K2.4@4885,710 4935,760 D34.2@5065,760 ; K3.4@4885,1155 4940,1210 D35.2@5065,1210 ; K4.4@4885,1600 4930,1645 D36.2@5065,1645 ; K5.4@4885,2035 4945,2095 D37.2@5065,2095 ; K6.4@4885,2480 4935,2530 D38.2@5065,2530 ; K7.4@4885,2925 4945,2985 D39.2@5065,2985 ; K8.4@4885,3370 4940,3425 D40.2@5065,3425
VUSB: C13.2 D43.1 MicroUSB.1 | length 963.9
  Top Layer w15: D43.1@1722,188 C13.2@1825,188 1825,160 1880,105 2335,105 2445,215 2555,215 2578.82,191.18 MicroUSB.1@2578.82,190.31
W5500_CS: U18.51 U19.5 | length 3370.7
  Top Layer w10: U18.51@3061.22,1452.24 3197.76,1452.24 3280,1370 3945,1370 4140,1565 v1(4140,1585) ; U19.5@3835,3305 3875,3265 v1(4250,3265)
  Bottom Layer w10: v1(4140,1585) 4235,1680 4235,3250 v1(4250,3265)
W5500_INT: U18.55 U19.6 | length 3132.4
  Top Layer w10: U18.55@2982.48,1452.24 2982.48,1597.48 3025,1640 3160,1640 3350,1450 3890,1450 4005,1565 v1(4005,1585) ; U19.6@3835,3205 v1(3995,3205)
  Bottom Layer w10: v1(3995,3205) 3975,3185 3975,1680 4005,1650 v1(4005,1585)
W5500_RST: U18.56 U19.8 | length 3742.8
  Top Layer w10: U18.56@2962.8,1452.24 2962.8,1612.8 3015,1665 3170,1665 3365,1470 3875,1470 3970,1565 v1(3970,1620) ; v1(3950,3305) U19.8@4635,3305
  Bottom Layer w10: v1(3950,3305) 3950,1640 v1(3970,1620)
pads on no net: JTAG.8 MicroUSB.0@2551.26,169.65 MicroUSB.0@2708.74,169.65 MicroUSB.4 SIM900A. U18.5 U18.6 U18.7 U18.15 U18.16 U18.17 U18.18 U18.23 U18.60 U18.61 U18.67 U18.70 U18.71 U18.73 U18.91 U18.95 U18.96 U18.97 U18.98 U19.9 U22.9 U22.10 U22.11 U22.12 U22.15 Y2.

## Polygon pours and split planes (outlines as drawn)
GND on Top Layer "Top Layer-No Net" (solid, remove dead copper, pour order 4): 262.38,3568.43 262.38,371.57 262.38,253.58 495.71,25 496.05,24.67 5012.51,24.67 5017.27,24.67 5129.9,135 5135,140 5135,3765 5135,3776.68 4946.16,3961.68 215,3961.68 215,3614.84 262.38,3568.43
GND on Bottom Layer "Top Layer-No Net" (solid, remove dead copper, pour order 3): 262.38,3566.92 262.38,371.43 262.38,253.49 495.71,25 496.05,24.67 5012.51,24.67 5017.27,24.67 5129.9,134.95 5135,139.95 5135,3763.41 5135,3775.08 4946.16,3960 215,3960 215,3613.31 262.38,3566.92

## Other copper
Top Layer:
  rectangle net NetD44_2: 3220,2955 3285,3125

## Silkscreen, mask and mechanical layers (free items; w line width, h text height)
Top Overlay:
  text "KEY2" at 4140,330 h55
  text "KEY0" at 3395,325 h55
  text "KEY3" at 4495,325 h55
  text "KEY1" at 3765,320 h55
Mechanical 1:
  circle w5: c5803.27,3843.57 r64.96
  circle w5: c5803.27,142.78 r64.96
  circle w5: c133.98,3843.57 r64.96
  circle w5: c133.98,142.78 r64.96
  lines w5: 15.87,103.41 ccw(c94.61,103.41) 94.61,24.67 5842.64,24.67 ccw(c5842.64,103.41) 5921.38,103.41 5921.38,3882.94 ccw(c5842.64,3882.94) 5842.64,3961.68 94.61,3961.68 ccw(c94.61,3882.94) 15.87,3882.94 15.87,103.41

## Text inside footprints (layer, text, board x,y; h text height)
JTAG: Bottom Overlay "10" at 1920,2260 h40 r180; Bottom Overlay "9" at 1960,2365 h40 r180; Bottom Overlay "2" at 2520,2255 h40 r180; Bottom Overlay "1" at 2530,2355 h40 r180